# Altium PCB WINGS_SIGNAL_NODE_PCB.PcbDoc
Units mm, origin at the board's own origin, x right, y up, seen from the top; angles counter-clockwise.
Board outline 100 x 40 mm, 2 copper layers (Top Layer, Bottom Layer), stack 1.671 mm thick; 69 components, 47 nets, 252 pads, 758 vias.
Unrouted connection lines stored in the file: 1.
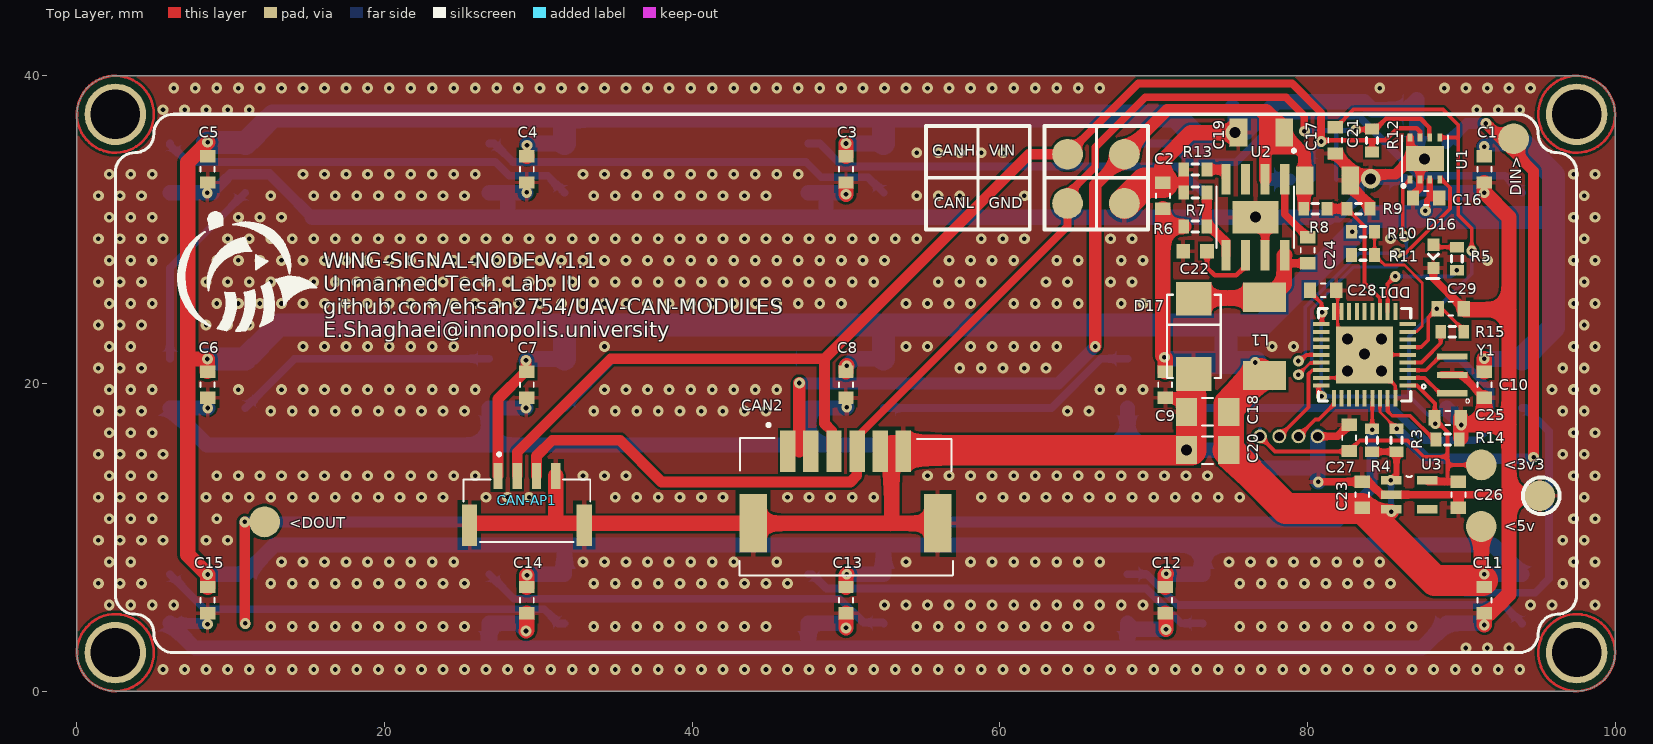
[diagram p0: Top Layer view]
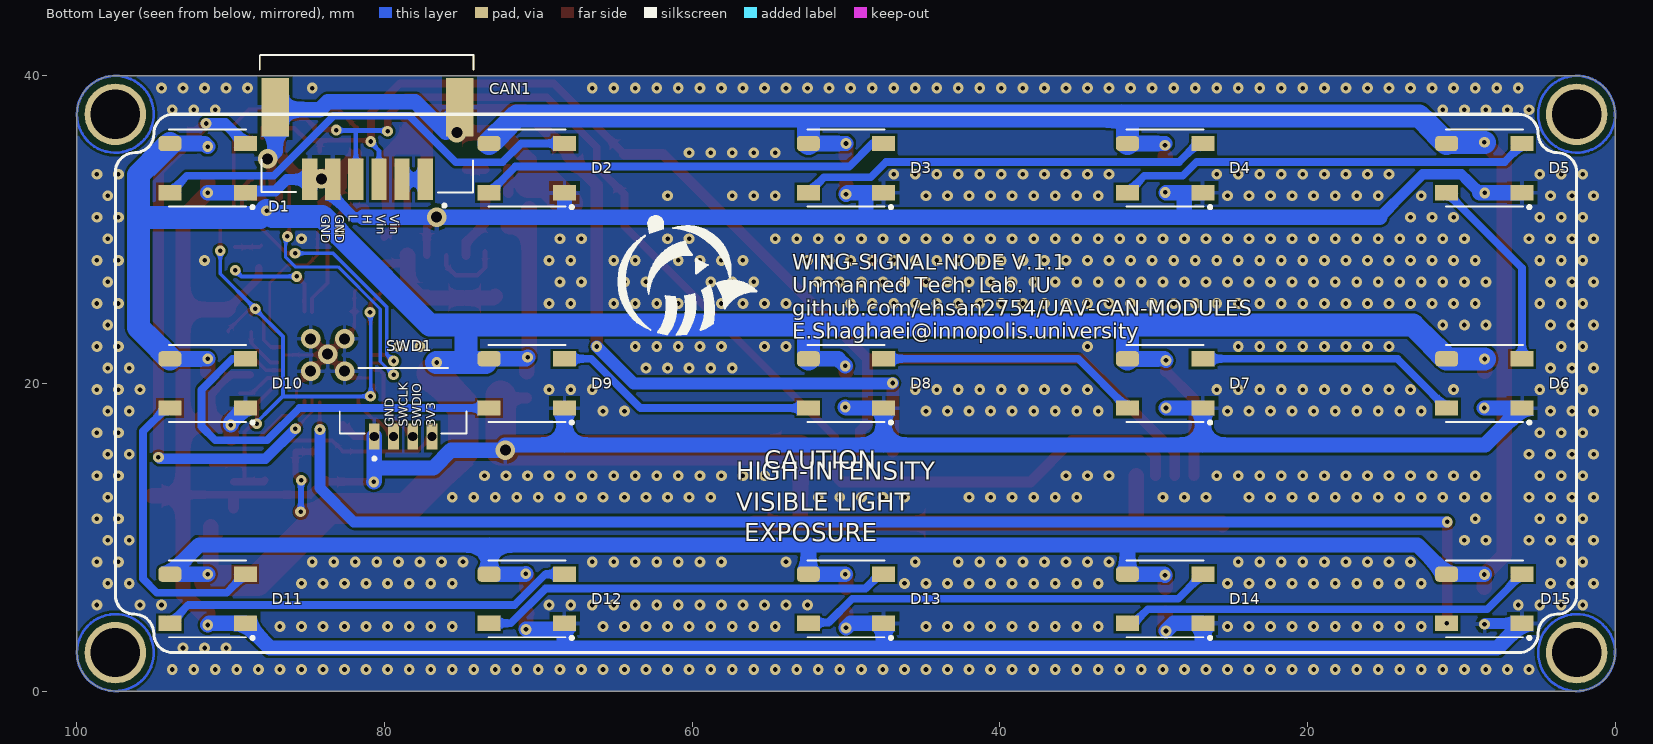
[diagram p1: Bottom Layer view, seen from below]
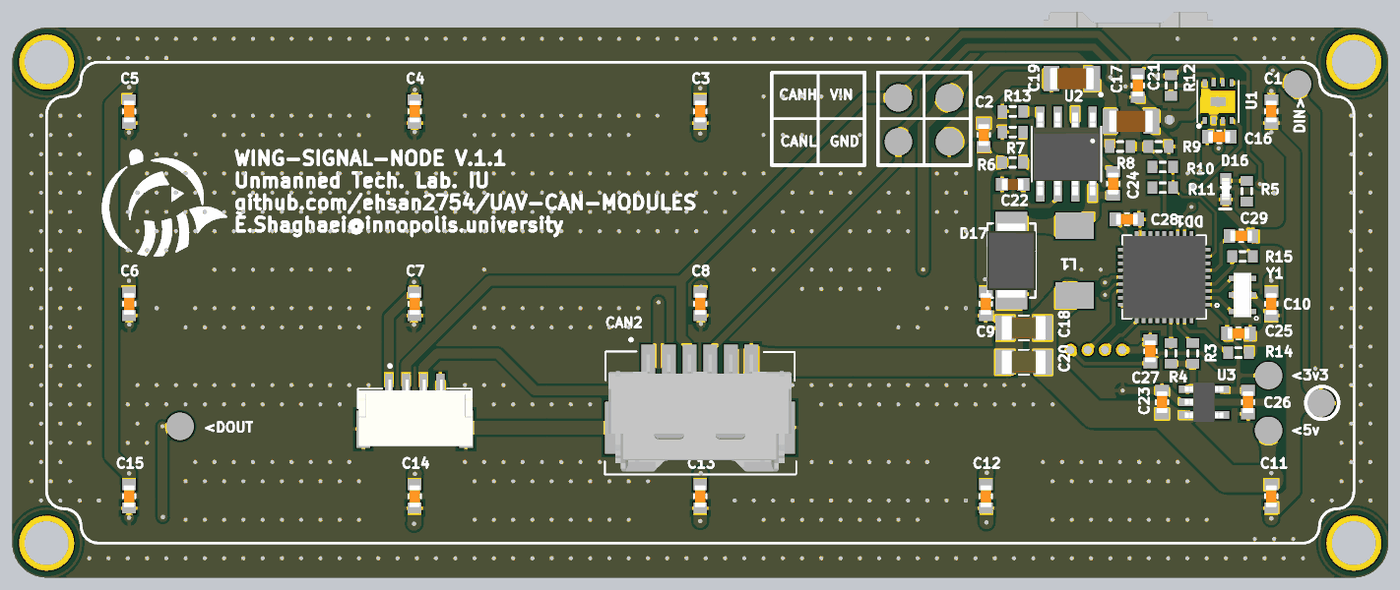
[diagram p2: 3D render of the assembled board from above, using the file's embedded part models]
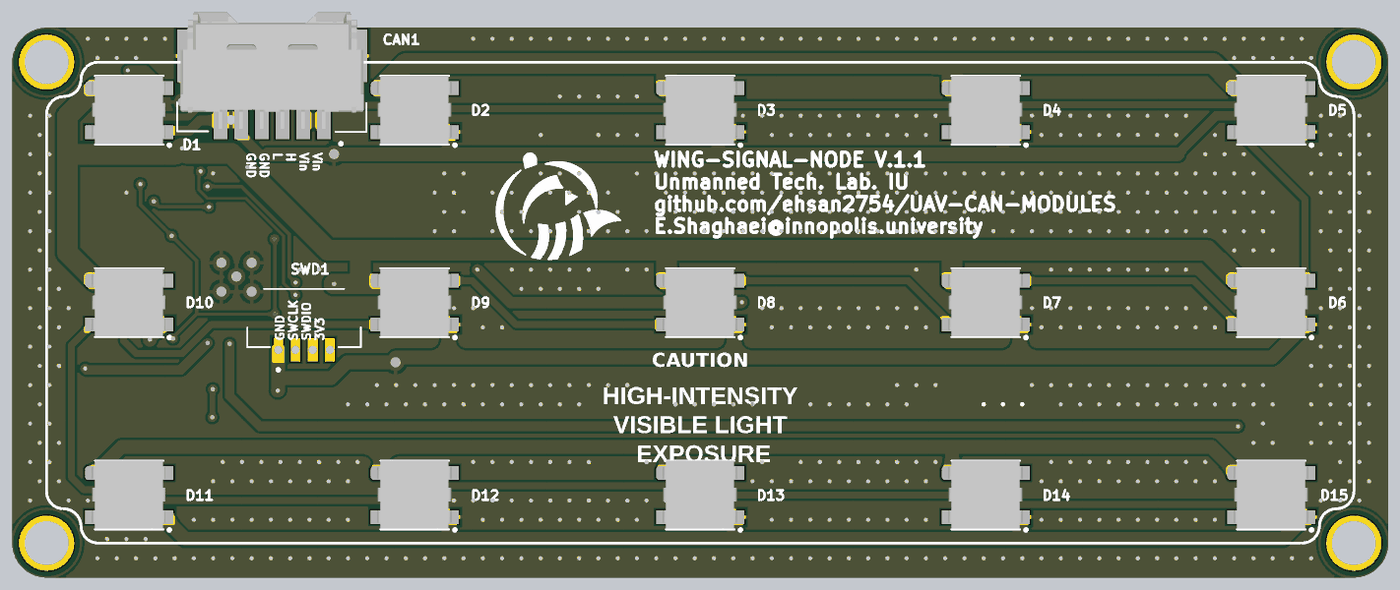
[diagram p3: 3D render of the assembled board from below, using the file's embedded part models]

## Layer stack, top to bottom
Top Solder: solder mask 0.0102, Solder Resist, Dk 3.5
Top Layer: signal copper 0.0356
Dielectric 1: dielectric 1.6, FR-4, Dk 4.8
Bottom Layer: signal copper 0.0356
Bottom Solder: solder mask 0.0102, Solder Resist, Dk 3.5

## Board outline
2.5,0 cw(c2.5,2.5) 0,2.5 0,37.5 cw(c2.5,37.5) 2.5,40 97.5,40 cw(c97.5,37.5) 100,37.5 100,2.5 cw(c97.5,2.5) 97.5,0

## Design rules (kind name [scope] priority, off if disabled: settings)
Clearance [All] p1: gap=0.17 ignorepadtopadclearanceinfootprint=FALSE
ComponentClearance [All] p1: gap=0.01 collisioncheckmode=3 verticalgap=0.01 showdistances=FALSE
FanoutControl Fanout_SOIC [IsSOIC] p3: bgadir=Out bgaviamode=Closest fanoutstyle=Auto fanoutdirection=Alternating viagrid=0.025 // Fanout_SOIC (Default Rule)
FanoutControl Fanout_Small [(CompPinCount < 5)] p4: bgadir=Out bgaviamode=Closest fanoutstyle=Auto fanoutdirection=OutThenIn viagrid=0.025 // Fanout_Small (Default Rule)
FanoutControl Fanout_Default [All] p5: bgadir=In bgaviamode=Closest fanoutstyle=Auto fanoutdirection=Alternating viagrid=0.025 // Fanout_Default (Default Rule)
PolygonConnect [All] p1: connectstyle=Relief reliefconductorwidth=0.254 reliefentries=4 polygonreliefangle="90 Angle" airgapwidth=0.254
RoutingCorners [All] p1: cornerstyle=45-Degree minsetback=2.5 maxsetback=2.5
RoutingPriority [All] p1 off: routingpriority=0
RoutingVias [All] p1: holewidth=0.3 width=0.7 viastyle="Through Hole" minholewidth=0.3 minwidth=0.7 maxholewidth=1 maxwidth=1.5
SolderMaskExpansion [All] p1: expansion=0.102 istentingtop=FALSE
Width [All] p1: maxlimit=5 minlimit=0.17 preferedwidth=0.3
24 further rules are at their usual default settings.

## Components (designator, comment, footprint, x,y, rotation, side; value= is the part's Value field where it differs from the comment)
C1 "GX035C104MAT2-500" *CAPC1608X90 91.5,33.912 r270 top value=0.1u
C2 "GX035C104MAT2-500" *CAPC1608X90 70.6,32.2 r90 top value=0.1u
C3 "GX035C104MAT2-500" *CAPC1608X90 50,33.912 r270 top value=0.1u
C4 "GX035C104MAT2-500" *CAPC1608X90 29.25,33.912 r270 top value=0.1u
C5 "GX035C104MAT2-500" *CAPC1608X90 8.5,33.912 r270 top value=0.1u
C6 "GX035C104MAT2-500" *CAPC1608X90 8.5,19.912 r270 top value=0.1u
C7 "GX035C104MAT2-500" *CAPC1608X90 29.25,19.912 r270 top value=0.1u
C8 "GX035C104MAT2-500" *CAPC1608X90 50,19.912 r270 top value=0.1u
C9 "GX035C104MAT2-500" *CAPC1608X90 70.75,19.912 r270 top value=0.1u
C10 "GX035C104MAT2-500" *CAPC1608X90 91.5,19.912 r270 top value=0.1u
C11 "GX035C104MAT2-500" *CAPC1608X90 91.5,5.912 r270 top value=0.1u
C12 "GX035C104MAT2-500" *CAPC1608X90 70.75,5.912 r270 top value=0.1u
C13 "GX035C104MAT2-500" *CAPC1608X90 50,5.912 r270 top value=0.1u
C14 "GX035C104MAT2-500" *CAPC1608X90 29.25,5.912 r270 top value=0.1u
C15 "GX035C104MAT2-500" *CAPC1608X90 8.5,5.912 r270 top value=0.1u
C16 "GX035C104MAT2-500" *CAPC1608X90 87.712,32.06 r180 top value=0.1u
C17 "GRM31CR71H225KA88L" *CAP3216X125N 81.3,33.2 r0 top value=2.2u
C18 "GRM31CR61A476KE15L" *CAPC3216X125N 73.512,18.16 r0 top value=47u
C19 "GRM31CR71H225KA88L" *CAP3216X125N 77,36.3 r180 top value=2.2u
C20 "GRM31CR61A476KE15L" *CAPC3216X125N 73.512,15.66 r0 top value=47u
C21 "GX035C104MAT2-500" *CAPC1608X90 81.8,35.8 r270 top value=0.1u
C22 "GRM188R71C105KA12D" CAPC1608X90N 72.7,28.6 r0 top value=1u
C23 "GX035C104MAT2-500" *CAPC1608X90 83.559,12.76 r90 top value=0.1u
C24 "GX035C104MAT2-500" *CAPC1608X90 80.012,28.66 r90 top value=0.1u
C25 "GX035C104MAT2-500" *CAPC1608X90 89.112,17.76 r0 top value=0.1u
C26 "GX035C104MAT2-500" *CAPC1608X90 89.812,12.76 r270 top value=0.1u
C27 "GX035C104MAT2-500" *CAPC1608X90 82.712,16.46 r90 top value=0.1u
C28 "GX035C104MAT2-500" *CAPC1608X90 81.012,26.06 r0 top value=0.1u
C29 "GX035C104MAT2-500" *CAPC1608X90 89.312,24.86 r0 top value=0.1u
CAN1 "502585-0670" MOLEX_502585-0670 81.112,33.46 r0 bottom
CAN2 "502585-0670" MOLEX_502585-0670 49.969,15.4 r0 top
CAN-AP1 "SM04B-GHS-TB(LF)(SN)-" JST_SM04B-GHS-TB(LF)(SN)- 29.25,11.719 r0 top
D1 "WS2812" LED_WS2812 91.5,34 r180 bottom
D2 "WS2812" LED_WS2812 70.75,34 r180 bottom
D3 "WS2812" LED_WS2812 50,34 r180 bottom
D4 "WS2812" LED_WS2812 29.25,34 r180 bottom
D5 "WS2812" LED_WS2812 8.5,34 r180 bottom
D6 "WS2812" LED_WS2812 8.5,20 r180 bottom
D7 "WS2812" LED_WS2812 29.25,20 r180 bottom
D8 "WS2812" LED_WS2812 50,20 r180 bottom
D9 "WS2812" LED_WS2812 70.75,20 r180 bottom
D10 "WS2812" LED_WS2812 91.5,20 r180 bottom
D11 "WS2812" LED_WS2812 91.5,6 r180 bottom
D12 "WS2812" LED_WS2812 70.75,6 r180 bottom
D13 "WS2812" LED_WS2812 50,6 r180 bottom
D14 "WS2812" LED_WS2812 29.25,6 r180 bottom
D15 "WS2812" LED_WS2812 8.5,6 r180 bottom
D16 "0603-LED-BLUE" *LEDM1608X80_LTE-C1906R-14(Primary) 88.187,28.26 r90 top
D17 "SK56" *SMB_P6SMB62AT3G(Primary) 72.612,23.06 r90 top
DD1 "STM32F103T8" *QFN50P600X600X100-37N 83.712,21.86 r180 top
L1 "IHLP2020BZER100M01" IHLP 77.212,23.06 r90 top
R3 "Res3" J1-0603 85.792,16.31 r270 top value=10K
R4 "Res3" J1-0603 84.2,16.31 r270 top value=10K
R5 "Res3" J1-0603 89.712,28.11 r90 top value=330
R6 "Res3" J1-0603 72.7,30.2 r180 top value=56k
R7 "RC0603FR-0710KL" J1-0603 72.712,32.41 r0 top value=10k
R8 "Res3" J1-0603 80.512,31.36 r180 top value=180k
R9 "Res3" J1-0603 83.312,31.36 r180 top value=10k
R10 "RC0603FR-0710KL" J1-0603 83.612,29.86 r180 top value=10k
R11 "RC0603FR-0710KL" J1-0603 83.612,28.36 r0 top value=10k
R12 "Res3" J1-0603 84.2,35.8 r270 top value=120
R13 "Res3" J1-0603 72.712,33.91 r0 top value=56k
R14 "RC0603FR-0710KL" J1-0603 89.112,16.36 r180 top value=10k
R15 "RC0603FR-0710KL" J1-0603 89.412,23.36 r180 top value=10k
SWD1 "BM04B-GHS-TBT(LF)(SN)(N)" JST_BM04B-GHS-holes 78.787,19.91 r0 bottom
U1 "TJA1042" SOT782-1 87.637,34.622 r0 top
U2 "LMR16030SDDAR" "*SOIC127P600X170-9N - duplicate" 76.612,30.81 r270 top
U3 "SPX3819M5-L-3-3/TR" *SOT95P280X145-5N 86.612,12.76 r0 top value=3V3
Y1 "CSTCE8M00G55-R0" *OSC_CSTCE8M00G55-R0 89.412,20.56 r90 top

## Footprints (in the part's own frame and the unit in brackets; to place one, negate y for a bottom-side part, rotate by r counter-clockwise, add the part's x,y. Pads: shape width x height; smd on the part's side, far side on the other; paste and mask are expansions set on the pad)
*CAP3216X125N [mm]
  rect 1.15x1.82 smd: 1(-1.485,0) 2(1.485,0)
  body extent -1.6,-0.8 1.6,0.8, height 1.22
*CAPC1608X90 [mm]
  rect 0.8x1 smd: 1(-0.85,0) 2(0.85,0)
  silkscreen extent -0.15,-0.45 0.15,0.45, body extent -0.8,-0.4 0.8,0.41, height 0.88
*CAPC3216X125N [mm]
  rect 1.38x1.82 smd: 1(-1.369,0) 2(1.369,0)
  silkscreen extent -0.36,-0.9 0.36,0.9, body extent -1.6,-0.87 1.6,0.87, height 1.71
*LEDM1608X80_LTE-C1906R-14(Primary) [mm]
  rect 0.8x0.8 smd: A(0.75,0) C(-0.75,0)
  silkscreen extent -1.45,-0.38 0.16,0.45, body extent -0.8,-0.3 0.8,0.3, height 1.15
*OSC_CSTCE8M00G55-R0 [mm]
  rect 0.4x2 smd: 1(-1.2,0) 2(0,0) 3(1.2,0)
  silkscreen extent -1.83,-1.13 -1.57,-0.87, body extent -1.6,-0.65 1.6,0.65, height 1
*QFN50P600X600X100-37N [mm]
  rect 1.08x0.26 smd: 1(-2.815,2) 2(-2.815,1.5) 3(-2.815,1) 4(-2.815,0.5) 5(-2.815,0) 6(-2.815,-0.5) 7(-2.815,-1) 8(-2.815,-1.5) 9(-2.815,-2) 19(2.815,-2) 20(2.815,-1.5) 21(2.815,-1) 22(2.815,-0.5) 23(2.815,0) 24(2.815,0.5) 25(2.815,1) 26(2.815,1.5) 27(2.815,2)
  rect 0.26x1.08 smd: 10(-2,-2.815) 11(-1.5,-2.815) 12(-1,-2.815) 13(-0.5,-2.815) 14(0,-2.815) 15(0.5,-2.815) 16(1,-2.815) 17(1.5,-2.815) 18(2,-2.815) 28(2,2.815) 29(1.5,2.815) 30(1,2.815) 31(0.5,2.815) 32(0,2.815) 33(-0.5,2.815) 34(-1,2.815) 35(-1.5,2.815) 36(-2,2.815)
  rect 3.7x3.7 smd: 37(0,0)
  silkscreen extent -3.97,-3 3,3, body extent -3,-3 3,3, height 1
*SMB_P6SMB62AT3G(Primary) [mm]
  rect 2.2x2.3 smd: A(-2.45,0) C(2.45,0)
  silkscreen extent -2.7,-1.75 2.7,1.75, body extent -2.72,-1.78 2.72,1.78, height 2.49
"*SOIC127P600X170-9N - duplicate" [mm]
  rect 1.97x0.6 smd: 1(-2.475,1.905) 2(-2.475,0.635) 3(-2.475,-0.635) 4(-2.475,-1.905) 5(2.475,-1.905) 6(2.475,-0.635) 7(2.475,0.635) 8(2.475,1.905)
  rect 2.13x3 smd: 9(0,0)
  silkscreen extent -4.42,-2.52 2,2.6, body extent -3,-2.45 3,2.45, height 1.69
*SOT95P280X145-5N [mil]
  rect 52x22 smd: 1(-46,37) 2(-46,0) 3(-46,-37) 4(46,-37) 5(46,37)
  silkscreen extent -7,46 7,48, body extent -55,-57 55,57, height 57
CAPC1608X90N [mm]
  rect 0.89x0.93 smd: 1(-0.77,0) 2(0.77,0)
  body extent -0.8,-0.4 0.8,0.4, height 0.9
IHLP [mil]
  rect 75x110 smd: 1(-100,0) 2(100,0)
  body extent -100,-100 100,100, height 79
J1-0603 [mm] "Chip Resistor, Body 1.6x0.8mm, IPC High Density"
  rect 0.7x0.9 smd: 1(-0.75,0) 2(0.75,0)
  silkscreen extent -0.2,-0.35 0.2,0.35, body extent -0.85,-0.48 0.85,0.48, height 0.9
JST_BM04B-GHS-holes [mm]
  rect 0.7x1.7 / inner rect 0.6x1.7 / far side round 0.9 hole 0.6: 1(1.875,3.35) 2(0.625,3.35) 3(-0.625,3.35) 4(-1.875,3.35)
  silkscreen extent -4.13,-1.1 4.13,4.9
JST_SM04B-GHS-TB(LF)(SN)- [mm]
  rect 0.6x1.7 smd: 1(-1.875,2.275) 2(-0.625,2.275) 3(0.625,2.275) 4(1.875,2.275)
  rect 1x2.7 smd: SH1(-3.725,-0.925) SH2(3.725,-0.925)
  silkscreen extent -4.13,-2.02 4.13,3.77, body extent -4.06,-2.16 4.19,2.69, height 4.35
LED_WS2812 [mm]
  rrect50% 1.5x1 smd: 1(-2.45,1.6)
  rect 1.5x1 smd: 2(-2.45,-1.6) 3(2.45,-1.6) 4(2.45,1.6)
  silkscreen extent -2.5,-2.64 3.02,2.5, body extent -2.7,-2.45 2.65,2.5, height 1.5
MOLEX_502585-0670 [mm]
  rect 1x2.7 smd: 1(-3.75,0.2) 2(-2.25,0.2) 3(-0.75,0.2) 4(0.75,0.2) 5(2.25,0.2) 6(3.75,0.2)
  rect 1.8x3.8 smd: P1(-6,-4.5) P2(6,-4.5)
  silkscreen extent -6.9,-7.9 7,2, body extent -6.65,-7.68 6.65,0.82, height 6.41
SOT782-1 [mm]
  rect 0.3x0.525 smd: 1(-0.975,-1.362) 2(-0.325,-1.362) 3(0.325,-1.362) 4(0.975,-1.362) 5(0.975,1.362) 6(0.325,1.362) 7(-0.325,1.362) 8(-0.975,1.362)
  rect 2.45x1.65 smd paste-2: P$9(0,0)
  silkscreen extent -1.5,-1.88 1.5,1.5, body extent -1.52,-1.52 1.52,1.52, height 0.85

## Part data
C1 C2 C3 C4 C5 C6 C7 C8 C9 C10 C11 C12 C13 C14 C15 C16 C21 C23 C24 C25 C26 C27 C28 C29: "Cap Thin Film 0.1uf 50v 0603", Package="0603 AVX", MF=AVX, Pacage Metric=1608, SnapEDA_Link=https://www.snapeda.com/parts/GX035C104MAT2-500/AVX/view-part/?ref=snap, Type=SMD
  C1 C2 C3 C4 C5 C6 C7 C8 C9 C10 C11 C12 C13 C14 C15 C16 C21 C24 C25 C27 C28 C29: MP="GX035C104MAT2-500 or CL10B104JB8NNNC"
  C23 C26: MP=GX035C104MAT2-500
C17 C19: "1206 2.2 uF 50 V В±10% Tolerance X7R SMT Multilayer Ceramic Capacitor", Package="1206 Murata", MF="Murata Electronics", MP=GRM31CR71H225KA88L, SnapEDA_Link=https://www.snapeda.com/parts/GRM31CR71H225KA88L/Murata%20Electronics%20North%20America/view-part/?ref=snap, Type=SMD
C18 C20: "Multilayer Ceramic Capacitor, GRM Series, 47 - F, - 10%, X5R, 10 V, 1206 [3216 Metric]", Package="1206 Murata Electronics", MF="Murata Electronics", MP=GRM31CR61A476KE15L, SnapEDA_Link=https://www.snapeda.com/parts/GRM31CR61A476KE15L/Murata%20Electronics%20North%20America/view-part/?ref=snap, Type=SMD
C22: "SMD Capacitor X7R(EIA) with Capacitance: 1.0uF Tol. 10%. Rated Voltage: 16Vdc", Package=0603, ChipDip_Link=https://www.chipdip.ru/product/grm188r71c105ka12d, HelpURL=https://static.chipdip.ru/lib/428/DOC005428493.pdf, MF="Murata Electronics", MP=GRM188R71C105KA12D, Pacage Metric=1608, SnapEDA_Link=https://www.snapeda.com/parts/GRM188R71C105KA12D/Murata%20Electronics%20North%20America/view-part/228340/?ref=snap, Type=SMD
CAN1 CAN2: "1.50mm Pitch, CLIK-Mate PCB Receptacle, Single Row, Surface Mount, Right-Angle, Tin Plating, Positive Lock, 6 Circuits, Natural", Package=None, MF=Molex, MP=502585-0670, SnapEDA_Link=https://www.snapeda.com/parts/502494-0670/Molex/view-part/?ref=snap, System=Connector, Type=SMD
CAN-AP1: "Connector Header Surface Mount, Right Angle 4 position 0.049 _1.25mm_", Package=None, ChipDip_Link=https://www.chipdip.ru/product/sm04b-ghs-tb-lf-sn-gh-1.25mm-header-side-ent, HelpURL=http://www.farnell.com/datasheets/2082975.pdf, MF="JST Sales", MP=SM04B-GHS-TB(LF)(SN), SnapEDA_Link=https://www.snapeda.com/parts/SM04B-GHS-TB%28LF%29%28SN%29-/JST%20Sales%20America%20Inc./view-part/2759740/?ref=snap, System=Connector
D1 D2 D3 D4 D5 D6 D7 D8 D9 D10 D11 D12 D13 D14 D15: "Addressable Lighting - 5 LED Discrete Serial _Shift Register_ Red, Green, Blue _RGB_ 5.00mm Dia", Package="SparkFun Electronics", Availability=Unavailable, ChipDip_Link=https://www.chipdip.ru/product/ws2812b, HelpURL=https://static.chipdip.ru/lib/554/DOC001554925.pdf, MF="SparkFun Electronics", MP=WS2812, Price=None, SnapEDA_Link=https://www.snapeda.com/parts/WS2812/SparkFun%20Electronics/view-part/106391/?ref=snap
D16: library part LTE-C1906R-14, "LED IrLED Chip LED 2-Pin SMD T/R", Package="0603 Lite-On", MP=0603-LED-BLUE, SnapEDA_Link=https://www.snapeda.com/parts/LTE-C1906R-14/Lite-On%20Inc./view-part/?ref=snap, Type=SMD
D17: "Диод Шоттки 5А 60В [SMB / DO-214AA]", Package="DO-214 Littelfuse", ChipDip_Link=https://www.chipdip.ru/product/sk56, MF="Littelfuse Inc.", MP=SK56, SnapEDA_Link=https://www.snapeda.com/parts/P6SMB62AT3G/Littelfuse%20Inc./view-part/?ref=snap, Type=SMD
DD1: "STM32F103T8U6, Микроконтроллер 32BIT ARM 64K FLASH [VFQFPN-36]", Package=VFQFPN-36, ChipDip_Link=https://www.chipdip.ru/product/stm32f103t8u6-2, HelpURL=http://www.st.com/stonline/products/literature/ds/13587.pdf, MF=STM, MP=STM32F103T8U6, SnapEDA_Link=https://www.snapeda.com/parts/STM32F103T8U6TR/STMicroelectronics/view-part/?ref=search&t=STM32F103T8U6, Type=SMD
L1: "10ÂµH Shielded Molded Inductor 2.3A 199mOhm Max Nonstandard", Package="Nonstandard Vishay", ChipDip_Link=https://www.chipdip.ru/product/ihlp2020bzer100m11-inductor-ihlp-smd-2020-10, HelpURL=http://www.vishay.com/docs/34253/ihlp-2020bz-01.pdf, MF="Vishay Dale", MP=IHLP2020BZER100M01, SnapEDA_Link=https://www.snapeda.com/parts/IHLP2020BZER100M01/Vishay%20Dale/view-part/44808/?ref=snap, Type=SMD
R3 R4 R5 R6 R8 R9 R13: "Resistor", Package=R0603, Pacage Metric=1608, Type=SMD
  R3 R4: ChipDip_Link=https://www.chipdip.ru/product0/9000079736, HelpURL=https://www.chipdip.ru/product0/9000079736, MP="4.7K 1% 0603"
  R5: ChipDip_Link=https://www.chipdip.ru/product0/9000079628, HelpURL=https://www.chipdip.ru/product0/9000079628, MP=RC0603FR-07330RL
  R6 R13: ChipDip_Link=https://www.chipdip.ru/product0/9000079754, HelpURL=https://www.chipdip.ru/product0/9000079754, MP=RC0603FR-0756KL
  R8: MP="180K 1% 0603"
  R9: ChipDip_Link=https://www.chipdip.ru/product0/9000079736, HelpURL=https://www.chipdip.ru/product0/9000079736, MP="10K 1% 0603"
R7 R10 R11 R14 R15: "10 kOhms 1 0.1 W 1 10 W Chip Resistor 0603 1608 Metric Thick Film", Package=R0603, ChipDip_Link=https://www.chipdip.ru/product0/9000079736, HelpURL=https://www.chipdip.ru/product0/9000079736, MF="Yageo or NXP", MP="10K 1% 0603", Pacage Metric=1608, SnapEDA_Link=https://www.snapeda.com/parts/RC0603FR-0710KL/Yageo/view-part/?ref=dk&t=RC0603FR-0710KL&con_ref=None, Type=SMD
R12: "120 Ohms 1 0.1 W 1 10 W Chip Resistor 0603 1608 Metric Thick Film", Package=R0603, ChipDip_Link=https://www.chipdip.ru/product0/9000079618, HelpURL=https://www.chipdip.ru/product0/9000079618, MP=RC0603FR-07120RL, Pacage Metric=1608, Type=SMD
SWD1: "Conn Shrouded Header HDR 4 POS 1.25mm Solder ST SMD Reel", Package=None, Instructions="Do not install", MF="JST Sales", MP=SM04B-GHS-TB(LF)(SN), SnapEDA_Link=https://www.snapeda.com/parts/BM04B-GHS-TBT%28LF%29%28SN%29%28N%29/JST%20Sales%20America%20Inc./view-part/?ref=snap, System=Connector, Type=SMD
U1: "1/1 Transceiver Half CANbus 8-SO", Package="VDFN-8 NXP USA", ChipDip_Link=https://www.chipdip.ru/product1/8002840332, HelpURL=https://static.chipdip.ru/lib/583/DOC001583059.pdf, MF="NXP USA", MP=TJA1042, SnapEDA_Link=https://www.snapeda.com/parts/TJA1042/NXP%20USA%20Inc./view-part/900919/?ref=snap, Type=SMD
U2: "LMR16030SDDAR, Conv DC-DC 4.3V to 60V Step Down Single-Out 1V to 50V 3A Automotive 8-Pin HSOP EP T/R", Package="PowerSOIC-8 Texas Instruments", ChipDip_Link=https://www.chipdip.ru/product1/8003448566, HelpURL=https://www.ti.com/lit/ds/symlink/lmr16030.pdf, MF="Texas Instruments", MP=LMR16030SDDAR, SnapEDA_Link=https://www.snapeda.com/parts/TPS54560DDA/Texas%20Instruments/view-part/?ref=snap, Type=SMD
U3: library part SPX3819M5-L, "Low Dropout Voltage Regulator, Adjustable 0.5A, В±1%, 2.5 to 16 Vin, 5-Pin SOT-23", Package="SOT-23-5 Exar", ChipDip_Link=https://www.chipdip.ru/product1/8003455237, HelpURL=http://www.farnell.com/datasheets/2614478.pdf, MF="MaxLinear, Inc.", MP=SPX3819M5-L-3-3/TR, SnapEDA_Link=https://www.snapeda.com/parts/SPX3819M5-L/MaxLinear%2C%20Inc./view-part/?ref=snap, Type=SMD
Y1: "Ceramic Resonator 8MHz ??0.5% _Tol_ ??0.2% _Stability_ 33pF 40Ohm 3-Pin CSMD T/R", Package="SMD-3 Murata", ChipDip_Link=https://www.chipdip.ru/product1/8001783721, HelpURL=https://www.murata.com/en-eu/api/pdfdownloadapi?cate=&partno=CSTCE8M00G55-R0, MF=Murata, MP=CSTCE8M00G55-R0, SnapEDA_Link=https://www.snapeda.com/parts/CSTCE8M00G55-R0/Murata%20Electronics%20North%20America/view-part/?ref=snap, Type=SMD

## Free pads (board coordinates)
  round 2 smd: 5(91.3,14.7) 6(68.1,31.7) 6(95.1,12.7) 8(91.3,10.7) 9(68.1,34.9) 10(12.2,11) 11(93.4,35.9) 12(64.4,31.7) 13(64.4,34.9)
  round 4 hole 3.2: ""(2.5,2.5) ""(2.5,37.5) ""(97.5,2.5) ""(97.5,37.5)

## Via types
v1: diameter 0.7, hole 0.3, Top Layer to Bottom Layer, tented both sides, 748 vias
v2: diameter 1.27, hole 0.711, Top Layer to Bottom Layer, tented both sides, 10 vias

## Nets (pads, with @x,y where several pads share a name; then routed paths per layer and width w, separated by ;. In a path a pad name is that pad's centre, name@x,y a point inside that pad or via, vN(x,y) a via of type N, cw(c..) or ccw(c..) an arc to the next point about the centre after c; other vN are vias at no path point)
3.3: C21.1 C25.1 C26.1 C27.1 C28.1 C29.1 DD1.1 DD1.6 DD1.19 DD1.27 pad.5 R15.1 SWD1.4 U1.5 U3.5 | length 79.1
  Top Layer w0.25: SWD1.4 77.896,15.576 82.746,15.576 C27.1 83.403,16.3 86.5,16.3 87.562,15.238 89.112,15.238 ; C28.1@80.112,26.06 80.112,26.01 80.912,25.21 v1@80.912,24.66 ; v1@80.712,19.17 80.712,19.855 80.717,19.86 DD1.27@80.812,19.86 ; DD1.19 80.937,23.86 80.942,23.865 v1(80.942,24.629) ; C21.1 81.85,36.65 83,37.8 88.8,37.8 89.8,36.8 89.8,35.985 89.8,35.863 ; DD1.1 87.123,19.86 88.283,18.7 88.283,17.78 C25.1 ; DD1.6@86.787,22.36 87.395,22.36 87.851,22.816 87.851,24.296 C29.1@88.404,24.849 ; C25.1@88.312,17.655 89.112,16.855 89.112,15.238 ; U1.5 89.679,35.985 89.8,35.863 ; C29.1@88.687,24.485 88.412,24.76 88.862,24.76 90.162,23.46 R15.1 ; 89.1,13.61 89.112,13.622 89.112,14.7 ; v1(90.682,28.622) 90.682,30.076 89.8,30.959 89.8,35.863 ; pad.5 89.112,14.7 ; 89.112,14.7 89.112,15.238
  Top Layer w0.5: U3.5 87.87,13.61 89.1,13.61 C26.1
  Bottom Layer w0.25: SWD1.4 SWD1.4@76.912,17.06 ; v1(80.942,24.629) 80.9,24.587 80.9,19.358 80.712,19.17 80.723,19.16 86.623,19.16 87.5,18.283 88.178,17.605 88.312,17.605 v1(88.312,17.38) ; 86.6,19.16 86.6,23.047 v1(88.412,24.86) ; v1@88.512,24.96 90.682,27.13 v1(90.682,28.622)
  other v1: 80.912,19.17
ADC_5V: DD1.8 R10.1 R11.2 | length 8.9
  Top Layer w0.18: R10.1 R11.2 85.022,27.7 86.3,27.7 87.46,26.54 87.46,23.741 87.079,23.36 DD1.8@86.912,23.36
ADC_VIN: DD1.12 R8.1 R9.2 | length 8.9
  Top Layer w0.25: R9.2@82.579,31.36 83.717,30.222 83.717,26.534 84.712,25.539 DD1.12@84.712,24.635
  Top Layer w0.6: R8.1 R9.2@82.512,31.36
BOOT0: DD1.35 R14.2 | length 4.6
  Top Layer w0.25: DD1.35@85.212,18.855 85.212,18.198 85.51,17.9 86.659,17.9 88.149,16.41 88.362,16.41 R14.2
CAN_H: CAN1.3 CAN2.3 CAN-AP1.2 pad.13 R12.2 U1.7 | length 83.4
  Top Layer w0.3: v1(80.9,35.73) 80.97,35.8 84.2,35.8 ; R12.2 84.2,35.8 ; U1.7 87.312,36.388 87.1,36.6 85.864,36.6 85.064,35.8 84.2,35.8
  Top Layer w0.5: pad.13 69,39.5 79,39.5 80.9,37.6 80.9,37.244 80.88,37.224 80.88,36.076 80.9,36.056 v1(80.9,35.73)
  Top Layer w0.7: CAN-AP1.2 28.625,15.525 34.7,21.6 48.6,21.6 ; CAN2.3 49.069,15.75 49.069,16.931 48.6,17.4 48.6,21.6 ; pad.13 61.9,34.9 48.6,21.6
  Bottom Layer w0.3: CAN1.3 80.362,35.137 80.9,35.674 v1(80.9,35.73)
CAN_L: CAN1.4 CAN2.4 CAN-AP1.3 pad.12 R12.1 U1.6 | length 80.1
  Top Layer w0.3: v1(83.141,36.47) 83.181,36.51 84.16,36.51 R12.1 ; R12.1@84.553,36.653 85.103,37.203 87.353,37.203 87.915,36.641 87.915,36.031 U1.6
  Top Layer w0.5: CAN2.4 50.719,16.544 64.4,30.225 pad.12 ; pad.12@64.4,31.82 64.4,32.3 66.2,34.1 66.2,35.352 69.448,38.6 78.6,38.6 79.8,37.4 v1(79.8,36.4)
  Top Layer w0.7: CAN-AP1.3 29.875,15.275 30.9,16.3 35.3,16.3 38,13.6 50.29,13.6 50.7,14.01 50.7,15.581 CAN2.4
  Bottom Layer w0.2: 81.862,36.397 81.91,36.445 81.936,36.47
  Bottom Layer w0.3: v1(79.8,36.4) 79.842,36.442 81.907,36.442 ; CAN1.4 81.862,36.397 ; 81.91,36.445 83.116,36.445 v1(83.141,36.47)
CAN_RXD: DD1.23 U1.4 | length 19.5
  Top Layer w0.25: v1(79.412,21.46) 79.532,21.46 79.931,21.86 DD1.23@80.759,21.86 ; v1(85.812,28.46) 86.36,28.46 89.257,31.357 89.257,32.726 88.724,33.26 U1.4
  Bottom Layer w0.25: v1(79.412,21.46) 79.424,21.46 79.857,21.892 79.857,24.979 83.337,28.46 v1(85.812,28.46)
CAN_TXD: DD1.24 U1.1 | length 19.3
  Top Layer w0.2: v1(79.412,20.56) 79.412,20.583 80.159,21.33 80.867,21.33 DD1.24 ; v1(86.312,29.56) 86.192,29.68 86.192,32.806 U1.1@86.616,33.23
  Bottom Layer w0.2: v1(79.412,20.56) 80.277,21.424 80.277,24.841 83.016,27.58 85.809,27.58 86.432,28.203 86.432,29.44 v1(86.312,29.56)
DIN: D1.4 DD1.34 pad.11 R3.1 | length 38.3
  Top Layer w0.2: DD1.34 84.712,18.139 v1(85.792,17.06)
  Top Layer w0.7: v1(91.6,36.9) 94.7,33.8 v1(94.7,15.2)
  Bottom Layer w0.7: v1(85.792,17.06) 87.752,15.1 94.6,15.1 v1(94.7,15.2) ; D1.4 90.35,36.9 v1(91.6,36.9)
DOUT: D15.2 DD1.33 pad.10 R4.1 | length 86.4
  Top Layer w0.25: R4.1@84.112,17.11 84.212,17.21 DD1.33@84.212,18.76 ; v1(84.2,17) R4.1
  Top Layer w0.7: v1(10.919,11) 10.919,4.431 v1(10.95,4.4)
  Bottom Layer w0.7: v1(10.919,11) 82,11 84.2,13.2 v1(84.2,17)
FB: R6.1 R7.2 U2.5 | length 4.5
  Top Layer w0.6: R6.1@73.462,30.41 R7.2 ; R6.1@73.512,30.36 74.707,29.165 U2.5
GND: C1.2 C2.2 C3.2 C4.2 C5.2 C6.2 C7.2 C8.2 C9.2 C10.2 C11.2 C12.2 C13.2 C14.2 C15.2 C16.2 C17.2 C18.1 C19.2 C20.1 C21.2 C22.1 C23.2 C25.2 C26.2 C27.2 C28.2 C29.2 CAN1.5 CAN1.6 CAN1.P1 CAN1.P2 CAN2.5 CAN2.6 CAN2.P1 CAN2.P2 CAN-AP1.4 CAN-AP1.SH1 CAN-AP1.SH2 D1.3 D2.3 D3.3 D4.3 D5.3 D6.3 D7.3 D8.3 D9.3 D10.3 D11.3 D12.3 D13.3 D14.3 D15.3 D16.C D17.A DD1.5 DD1.17 DD1.18 DD1.26 DD1.36 DD1.37 pad.6 R7.1 R9.1 R13.1 R14.1 SWD1.1 U1.2 U1.8 U1.P$9 U2.7 U2.9 U3.2 Y1.2 | length 493.6
  Top Layer w0.2: DD1.26 82.212,20.36 DD1.37 ; DD1.18 81.962,24.675 ; C28.2 81.962,25.96 81.962,24.675 ; DD1.17 81.962,24.675 ; DD1.36 85.712,19.86 DD1.37 ; DD1.5 DD1.37 ; 81.962,24.675 81.962,23.61 DD1.37
  Top Layer w0.3: DD1.37 83.712,21.912 DD1.37@84.7,22.9
  Top Layer w0.5: v2(76.612,30.81) 77.247,30.175 U2.7 ; SWD1.1 81.962,16.56 C27.2 ; v1(80.7,13.6) 80.71,13.61 C23.2 83.721,13.61 83.838,13.493 83.838,13.747 84.825,12.76 U3.2 93.04,12.76 ; U1.8 86.666,35.981 86.666,35.235 87.278,34.622 U1.P$9 87.312,34.297 U1.2 87.3,33.247 87.3,32.691 86.862,32.254 C16.2 ; D16.C 88.187,26.835 C29.2 ; Y1.2@88.731,20.56 Y1.2 90.023,20.56 C10.2@91.505,19.078 ; R14.1 R14.1@89.962,16.46
  Top Layer w0.7: C9.2 72.305,19.062 72.443,19.2 ; C2.2@70.75,33.062 71.864,33.062 71.962,33.16 ; R7.1 71.962,33.16 ; R13.1 71.962,33.16 ; C21.2 82.785,33.965 C17.2 ; R9.1@84,31.6 82.785,32.815 C17.2 ; U1.P$9@86.865,34.764 85.7,33.6 83.185,33.6 C17.2 ; C26.2 89.812,12.592
  Top Layer w1: CAN-AP1.SH1 25.525,10.9 31,10.9 ; v1(29.2,3.91) 29.25,3.96 C14.2 ; CAN-AP1.4 31.125,11.025 31,10.9 ; v1(50,4.11) C13.2 ; v1(50,32.3) C3.2@50,32.9 ; 52.969,15.6 52.969,10.969 52.9,10.9 ; CAN2.P2 52.9,10.9 ; C2.2 70.6,34.5 72.4,36.3 v2(75.3,36.3) C19.2 ; C12.2 70.8,5.012 v1(70.8,4.01) ; R14.1@89.962,16.46 C25.2 ; v1(90,17.3) 91.49,17.3 ; C29.2 90.222,24.8 93.1,24.8 ; v1(91.5,4.3) C11.2 91.862,5.062 93.1,6.3 93.1,12.7 ; C10.2 91.49,19.052 91.49,17.3 ; C1.2 v1(91.5,32.4) 93.1,30.8 93.1,24.8 ; 93.04,12.76 93.1,12.7 ; pad.6@95.1,12.7 93.1,12.7 ; 31,10.9 CAN2.P1 52.9,10.9 ; 91.49,17.3 93.1,17.3 ; 93.1,12.7 93.1,17.3 ; 93.1,17.3 93.1,24.8
  Top Layer w2: 52.969,15.6 53.029,15.66 v2(72.143,15.66) ; pad.6@68.1,31.7 68.1,31.706 69.444,33.05 C2.2 ; C20.1@72.443,15.66 72.443,19.2
  Bottom Layer w0.7: D15.3 8.443,4.4 v1(8.49,4.353) ; v1@8.8,32.4 10,33.6 12.5,33.6 15.3,30.8 ; 81.4,30.8 82,30.8 83.362,32.162 CAN1.5 CAN1.6 86.352,33.26 87.108,32.503 88.947,32.503 D1.3
  Bottom Layer w1: D15.3 7.65,2.8 26.9,2.8 ; D5.3 v1@8.8,32.4 ; v1(8.506,18.406) 8.5,18.4 D6.3 8.45,16 26.8,16 ; 15.3,30.8 27.8,30.8 ; D4.3 28,32.4 ; v1(29.2,3.91) 28.71,4.4 D14.3 26.8,2.9 26.9,2.8 ; v1(29.2,18.4) D7.3 26.8,16 ; v1@29.2,32.4 28,32.4 ; D3.3 49.9,32.4 v1(50,32.3) ; 48.7,32.175 48.7,30.8 ; v1(50,4.11) 49.71,4.4 D13.3 47.55,2.85 47.5,2.8 ; v1(50.05,18.464) 49.986,18.4 D8.3 47.55,16 ; D9.3 68.3,16 ; D2.3 68.3,30.8 ; v1(70.8,4.01) 68.69,4.01 D12.3 68.3,3.1 68,2.8 ; v2@72.143,15.784 72.268,15.66 75.665,15.66 76.824,14.5 80.667,14.5 ; v2@72.143,16 68.3,16 ; CAN1.P1 CAN1.P1@75.3,37.772 ; v2(75.3,36.3) CAN1.P1@75.3,37.772 ; SWD1.1 80.667,16.555 80.667,14.5 ; v1(80.7,13.6) 80.667,13.633 80.667,14.5 ; 81.4,30.8 68.3,30.8 ; v2(87.6,34.6) 87.112,35.088 CAN1.P2 87.112,38.46 86.453,37.8 84.201,37.8 83.681,38.32 78.019,38.32 76.012,36.313 76.012,37.06 CAN1.P1@75.3,37.772 ; D10.3 90,17.45 v1(90,17.3) ; D1.3 v1(91.5,32.4) ; v1(91.5,4.3) 91.4,4.4 D11.3 87.45,2.8 68,2.8 ; 26.8,16 47.55,16 ; 26.9,2.8 47.5,2.8 ; 27.8,30.8 48.7,30.8 ; 27.8,30.8 28,31 28,32.4 ; 47.5,2.8 68,2.8 ; 47.55,16 68.3,16 ; 48.7,30.8 68.3,30.8
  other v1: 5.6,1.4 7,1.4 8.4,1.4 9.8,1.4 11.2,1.4 12.6,1.4 14,1.4 15.4,1.4 16.8,1.4 18.2,1.4 19.6,1.4 21,1.4 22.4,1.4 23.8,1.4 25.2,1.4 26.6,1.4 28,1.4 29.4,1.4 30.8,1.4 32.2,1.4 33.6,1.4 35,1.4 36.4,1.4 37.8,1.4 39.2,1.4 40.6,1.4 42,1.4 43.4,1.4 44.8,1.4 46.2,1.4 47.6,1.4 49,1.4 50.4,1.4 51.8,1.4 53.2,1.4 54.6,1.4 56,1.4 57.4,1.4 58.8,1.4 60.2,1.4 61.6,1.4 63,1.4 64.4,1.4 65.8,1.4 67.2,1.4 68.6,1.4 70,1.4 71.4,1.4 72.8,1.4 74.2,1.4 75.6,1.4 77,1.4 78.4,1.4 79.8,1.4 81.2,1.4 82.6,1.4 84,1.4 85.4,1.4 86.8,1.4 88.2,1.4 89.6,1.4 91,1.4 92.4,1.4 93.8,1.4 90.3,2.8 91.7,2.8 93.1,2.8 12.6,4.2 14,4.2 15.4,4.2 16.8,4.2 18.2,4.2 19.6,4.2 21,4.2 22.4,4.2 23.8,4.2 25.2,4.2 33.6,4.2 35,4.2 36.4,4.2 37.8,4.2 39.2,4.2 40.6,4.2 42,4.2 43.4,4.2 44.8,4.2 54.6,4.2 56,4.2 57.4,4.2 58.8,4.2 60.2,4.2 61.6,4.2 63,4.2 64.4,4.2 65.8,4.2 75.6,4.2 77,4.2 78.4,4.2 79.8,4.2 81.2,4.2 82.6,4.2 84,4.2 85.4,4.2 86.8,4.2 2.1,5.6 3.5,5.6 4.9,5.6 6.3,5.6 52.5,5.6 53.9,5.6 55.3,5.6 56.7,5.6 58.1,5.6 59.5,5.6 60.9,5.6 62.3,5.6 63.7,5.6 65.1,5.6 66.5,5.6 67.9,5.6 69.3,5.6 94.5,5.6 95.9,5.6 98.7,5.6 1.4,7 2.8,7 4.2,7 12.6,7 14,7 15.4,7 16.8,7 18.2,7 19.6,7 21,7 22.4,7 23.8,7 25.2,7 33.6,7 35,7 36.4,7 37.8,7 39.2,7 40.6,7 42,7 43.4,7 44.8,7 46.2,7 75.6,7 77,7 78.4,7 79.8,7 81.2,7 82.6,7 84,7 85.4,7 96.6,7 98,7 2.1,8.4 3.5,8.4 13.3,8.4 14.7,8.4 16.1,8.4 17.5,8.4 18.9,8.4 20.3,8.4 21.7,8.4 23.1,8.4 24.5,8.4 32.9,8.4 34.3,8.4 35.7,8.4 37.1,8.4 38.5,8.4 39.9,8.4 41.3,8.4 42.7,8.4 45.5,8.4 53.9,8.4 58.1,8.4 59.5,8.4 60.9,8.4 62.3,8.4 63.7,8.4 65.1,8.4 66.5,8.4 74.9,8.4 76.3,8.4 77.7,8.4 79.1,8.4 80.5,8.4 81.9,8.4 83.3,8.4 84.7,8.4 97.3,8.4 98.7,8.4 1.4,9.8 2.8,9.8 4.2,9.8 5.6,9.8 8.4,9.8 9.8,9.8 96.6,9.8 98,9.8 2.1,11.2 3.5,11.2 4.9,11.2 9.1,11.2 97.3,11.2 98.7,11.2 1.4,12.6 2.8,12.6 4.2,12.6 5.6,12.6 8.4,12.6 9.8,12.6 11.2,12.6 12.6,12.6 14,12.6 15.4,12.6 16.8,12.6 18.2,12.6 19.6,12.6 21,12.6 22.4,12.6 23.8,12.6 26.6,12.6 28,12.6 29.4,12.6 35,12.6 36.4,12.6 37.8,12.6 39.2,12.6 40.6,12.6 42,12.6 46.2,12.6 47.6,12.6 49,12.6 50.4,12.6 51.8,12.6 58.8,12.6 60.2,12.6 61.6,12.6 63,12.6 64.4,12.6 65.8,12.6 67.2,12.6 68.6,12.6 70,12.6 71.4,12.6 72.8,12.6 74.2,12.6 75.6,12.6 98,12.6 2.1,14 3.5,14 4.9,14 9.1,14 10.5,14 11.9,14 13.3,14 14.7,14 16.1,14 17.5,14 18.9,14 20.3,14 21.7,14 23.1,14 24.5,14 25.9,14 32.9,14 34.3,14 35.7,14 55.3,14 56.7,14 58.1,14 59.5,14 60.9,14 62.3,14 63.7,14 65.1,14 66.5,14 67.9,14 69.3,14 70.7,14 72.1,14 73.5,14 97.3,14 98.7,14 1.4,15.4 2.8,15.4 4.2,15.4 5.6,15.4 96.6,15.4 98,15.4 2.1,16.8 3.5,16.8 4.9,16.8 97.3,16.8 98.7,16.8 1.4,18.2 2.8,18.2 4.2,18.2 12.6,18.2 14,18.2 15.4,18.2 16.8,18.2 18.2,18.2 19.6,18.2 21,18.2 22.4,18.2 23.8,18.2 25.2,18.2 33.6,18.2 35,18.2 36.4,18.2 37.8,18.2 39.2,18.2 40.6,18.2 42,18.2 43.4,18.2 44.8,18.2 64.4,18.2 65.8,18.2 96.6,18.2 98,18.2 2.1,19.6 3.5,19.6 4.9,19.6 10.5,19.6 13.3,19.6 14.7,19.6 16.1,19.6 17.5,19.6 18.9,19.6 20.3,19.6 21.7,19.6 23.1,19.6 24.5,19.6 25.9,19.6 34.3,19.6 35.7,19.6 37.1,19.6 38.5,19.6 39.9,19.6 41.3,19.6 42.7,19.6 44.1,19.6 45.5,19.6 66.5,19.6 67.9,19.6 69.3,19.6 95.9,19.6 97.3,19.6 98.7,19.6 1.4,21 2.8,21 4.2,21 57.4,21 58.8,21 60.2,21 61.6,21 63,21 96.6,21 98,21 2.1,22.4 3.5,22.4 14.7,22.4 16.1,22.4 17.5,22.4 18.9,22.4 20.3,22.4 21.7,22.4 23.1,22.4 24.5,22.4 34.3,22.4 53.9,22.4 55.3,22.4 58.1,22.4 59.5,22.4 60.9,22.4 62.3,22.4 63.7,22.4 77.7,22.4 79.1,22.4 97.3,22.4 98.7,22.4 1.4,23.8 2.8,23.8 4.2,23.8 8.4,23.8 9.8,23.8 11.2,23.8 98,23.8 2.1,25.2 3.5,25.2 4.9,25.2 9.1,25.2 10.5,25.2 11.9,25.2 13.3,25.2 14.7,25.2 16.1,25.2 17.5,25.2 18.9,25.2 20.3,25.2 21.7,25.2 23.1,25.2 24.5,25.2 25.9,25.2 27.3,25.2 28.7,25.2 30.1,25.2 31.5,25.2 32.9,25.2 34.3,25.2 35.7,25.2 37.1,25.2 38.5,25.2 39.9,25.2 41.3,25.2 42.7,25.2 44.1,25.2 45.5,25.2 46.9,25.2 48.3,25.2 49.7,25.2 53.9,25.2 55.3,25.2 56.7,25.2 58.1,25.2 60.9,25.2 62.3,25.2 63.7,25.2 65.1,25.2 67.9,25.2 69.3,25.2 97.3,25.2 98.7,25.2 1.4,26.6 2.8,26.6 4.2,26.6 8.4,26.6 9.8,26.6 11.2,26.6 12.6,26.6 14,26.6 15.4,26.6 16.8,26.6 18.2,26.6 19.6,26.6 21,26.6 22.4,26.6 23.8,26.6 25.2,26.6 26.6,26.6 28,26.6 29.4,26.6 30.8,26.6 32.2,26.6 33.6,26.6 35,26.6 36.4,26.6 37.8,26.6 39.2,26.6 40.6,26.6 42,26.6 43.4,26.6 44.8,26.6 46.2,26.6 47.6,26.6 49,26.6 50.4,26.6 51.8,26.6 56,26.6 57.4,26.6 58.8,26.6 63,26.6 64.4,26.6 67.2,26.6 68.6,26.6 98,26.6 2.1,28 3.5,28 4.9,28 9.1,28 10.5,28 11.9,28 13.3,28 14.7,28 16.1,28 17.5,28 18.9,28 20.3,28 21.7,28 23.1,28 24.5,28 25.9,28 27.3,28 28.7,28 30.1,28 31.5,28 32.9,28 34.3,28 35.7,28 37.1,28 38.5,28 39.9,28 41.3,28 42.7,28 44.1,28 45.5,28 46.9,28 48.3,28 49.7,28 51.1,28 52.5,28 56.7,28 58.1,28 59.5,28 60.9,28 63.7,28 65.1,28 67.9,28 69.3,28 91.7,28 97.3,28 98.7,28 1.4,29.4 2.8,29.4 4.2,29.4 5.6,29.4 9.8,29.4 11.2,29.4 12.6,29.4 14,29.4 15.4,29.4 16.8,29.4 18.2,29.4 19.6,29.4 21,29.4 22.4,29.4 23.8,29.4 25.2,29.4 26.6,29.4 28,29.4 29.4,29.4 30.8,29.4 32.2,29.4 33.6,29.4 35,29.4 36.4,29.4 37.8,29.4 39.2,29.4 40.6,29.4 42,29.4 43.4,29.4 44.8,29.4 46.2,29.4 47.6,29.4 49,29.4 50.4,29.4 51.8,29.4 53.2,29.4 54.6,29.4 58.8,29.4 60.2,29.4 61.6,29.4 67.2,29.4 68.6,29.4 85.4,29.4 98,29.4 2.1,30.8 3.5,30.8 4.9,30.8 10.5,30.8 11.9,30.8 13.3,30.8 97.3,30.8 98.7,30.8 1.4,32.2 2.8,32.2 4.2,32.2 12.6,32.2 15.4,32.2 16.8,32.2 18.2,32.2 19.6,32.2 21,32.2 22.4,32.2 23.8,32.2 25.2,32.2 33.6,32.2 35,32.2 36.4,32.2 37.8,32.2 39.2,32.2 40.6,32.2 42,32.2 43.4,32.2 44.8,32.2 54.6,32.2 56,32.2 57.4,32.2 61.6,32.2 98,32.2 8.479,32.386 29.25,32.419 2.1,33.6 3.5,33.6 4.9,33.6 14.7,33.6 16.1,33.6 17.5,33.6 18.9,33.6 20.3,33.6 21.7,33.6 23.1,33.6 24.5,33.6 25.9,33.6 32.9,33.6 34.3,33.6 35.7,33.6 37.1,33.6 38.5,33.6 39.9,33.6 41.3,33.6 42.7,33.6 44.1,33.6 45.5,33.6 46.9,33.6 97.3,33.6 98.7,33.6 54.6,35 56,35 57.4,35 58.8,35 60.2,35 5.6,37.8 7,37.8 8.4,37.8 9.8,37.8 11.2,37.8 91,37.8 92.4,37.8 93.8,37.8 6.3,39.2 7.7,39.2 9.1,39.2 10.5,39.2 11.9,39.2 13.3,39.2 14.7,39.2 16.1,39.2 17.5,39.2 18.9,39.2 20.3,39.2 21.7,39.2 23.1,39.2 24.5,39.2 25.9,39.2 27.3,39.2 28.7,39.2 30.1,39.2 31.5,39.2 32.9,39.2 34.3,39.2 35.7,39.2 37.1,39.2 38.5,39.2 39.9,39.2 41.3,39.2 42.7,39.2 44.1,39.2 45.5,39.2 46.9,39.2 48.3,39.2 49.7,39.2 51.1,39.2 52.5,39.2 53.9,39.2 55.3,39.2 56.7,39.2 58.1,39.2 59.5,39.2 60.9,39.2 62.3,39.2 63.7,39.2 65.1,39.2 66.5,39.2 84.7,39.2 88.9,39.2 90.3,39.2 91.7,39.2 93.1,39.2 94.5,39.2
  other v2: 82.6,20.8 84.8,20.8 83.7,21.9 82.6,22.9 84.8,22.9 84.1,33.3
LED1: DD1.11 R5.1 | length 6.7
  Top Layer w0.25: DD1.11 85.212,25.633 85.212,26.472 v1(85.7,26.96)
  Bottom Layer w0.25: v1(85.7,26.96) 89.312,26.96 v1(89.712,27.36)
NetC22_2: C22.2 U2.6 | length 4.7
  Top Layer w0.3: C22.2 73.47,27.53 73.97,27.03 75.381,27.03 U2.6@75.865,27.514 ; U2.6@75.853,27.526 75.977,27.65 U2.6
NetC24_1: C24.1 D17.C L1.2 U2.8 | length 9.5
  Top Layer w0.5: U2.8@78.512,27.86 78.562,27.81 C24.1
  Top Layer w1: D17.C@72.812,25.66 72.917,25.555 77.167,25.555 L1.2 77.657,25.6 78.5,26.443 78.5,28.317 U2.8
NetC24_2: C24.2 U2.1 | length 4.4
  Top Layer w0.5: U2.1 78.517,32.063 78.532,32.048 78.532,30.99 C24.2
NetD1_2: D1.2 D2.4 | length 29.5
  Bottom Layer w0.5: D2.4 71.114,35.6 72.336,34.378 75.378,34.378 78.4,37.4 83.3,37.4 87.2,33.5 92.85,33.5 D1.2
NetD2_2: D2.2 D3.4 | length 27
  Bottom Layer w0.5: D3.4 48.3,35.6 49.8,34.1 71.5,34.1 D2.2
NetD3_2: D3.2 D4.4 | length 27
  Bottom Layer w0.5: D4.4 27.14,35.6 28.34,34.4 47.394,34.4 48.394,33.4 51.45,33.4 D3.2
NetD4_2: D4.2 D5.4 | length 27
  Bottom Layer w0.5: D5.4 6.05,35.517 7.167,34.4 27.2,34.4 28.1,33.5 30.6,33.5 31.542,32.558 D4.2
NetD5_2: D5.2 D6.4 | length 12.8
  Bottom Layer w0.5: D6.4 6.05,27.5 D5.2
NetD6_2: D6.2 D7.4 | length 17.2
  Bottom Layer w0.5: D6.2 14.15,21.6 D7.4
NetD7_2: D7.2 D8.4 | length 17.2
  Bottom Layer w0.5: D7.2 34.9,21.6 D8.4
NetD8_2: D8.2 D9.4 | length 17.2
  Bottom Layer w0.5: D8.2 63.36,18.4 66.56,21.6 D9.4
NetD9_2: D9.2 D10.4 | length 26
  Bottom Layer w0.5: D9.2 85.54,18.4 87.64,16.3 91,16.3 91.9,17.2 91.9,19.6 89.9,21.6 D10.4
NetD10_2: D10.2 D11.4 | length 19.5
  Bottom Layer w0.5: D11.4 90.25,6.4 94.8,6.4 95.7,7.3 95.7,16.9 94.2,18.4 D10.2
NetD11_2: D11.2 D12.4 | length 27
  Bottom Layer w0.5: D12.4 69.548,7.6 71.548,5.6 92.75,5.6 D11.2
NetD12_2: D12.2 D13.4 | length 27
  Bottom Layer w0.5: D13.4 47.8,7.6 48.73,6.67 69.53,6.67 71.789,4.411 73.189,4.411 D12.2
NetD13_2: D13.2 D14.4 | length 27
  Bottom Layer w0.5: D14.4 28.4,6 49.6,6 51.139,4.461 52.389,4.461 D13.2
NetD14_2: D14.2 D15.4 | length 27
  Bottom Layer w0.5: D15.4 8.32,5.33 30.37,5.33 31.3,4.4 D14.2
NetD16_A: D16.A R5.2 | length 1.7
  Top Layer w0.25: D16.A@88.012,28.96 88.112,28.86 R5.2
NetDD1_2: DD1.2 Y1.1 | length 3.1
  Top Layer w0.25: DD1.2@86.687,20.36 87.612,20.36 88.612,19.36 Y1.1
NetDD1_3: DD1.3 Y1.3 | length 3.1
  Top Layer w0.25: DD1.3@86.712,20.86 87.712,20.86 88.612,21.76 Y1.3
NetR13_2: R13.2 U2.4 | length 1.3
  Top Layer w0.2: U2.4@74.662,33.91 U2.4@74.712,33.86
  Top Layer w0.6: R13.2 U2.4@74.662,33.91
NRST: DD1.4 R15.2 | length 2.9
  Top Layer w0.25: DD1.4@86.987,21.36 87.412,21.36 88.094,22.041 88.094,22.058 88.662,22.627 R15.2
PA15: DD1.29
PB3: DD1.30
PB4: DD1.31
PB5: DD1.32
SWDIO: DD1.25 SWD1.3 | length 5.5
  Top Layer w0.25: SWD1.3 80.057,18.455 80.057,20.607 80.31,20.86 DD1.25@80.624,20.86
SWLK: DD1.28 SWD1.2 | length 3.5
  Top Layer w0.25: SWD1.2@79.412,16.66 79.512,16.66 80.509,17.657 80.734,17.657 81.712,18.635 DD1.28
T3CH1/ADC6: DD1.13
T3CH2/ADC7: DD1.14
T3CH3/ADC8: DD1.15
T3CH4/ADC9: DD1.16
VCC: C1.1 C2.1 C3.1 C4.1 C5.1 C6.1 C7.1 C8.1 C9.1 C10.1 C11.1 C12.1 C13.1 C14.1 C15.1 C16.1 C18.2 C20.2 C23.1 CAN-AP1.1 D1.1 D2.1 D3.1 D4.1 D5.1 D6.1 D7.1 D8.1 D9.1 D10.1 D11.1 D12.1 D13.1 D14.1 D15.1 L1.1 pad.8 R3.2 R4.2 R6.2 R10.2 U1.3 U3.1 U3.3 | length 404.4
  Top Layer w0.3: C6.1@8.486,20.776 C6.1
  Top Layer w0.4: R4.2 R3.2 85.792,14.073 v1(85.418,13.699) U3.1@85.19,13.699 ; v1(87.667,31.233) 87.782,31.348 87.782,31.901 87.94,32.06 C16.1 ; 87.952,32.152 U1.3@87.952,33.25
  Top Layer w0.7: CAN-AP1.1 27.375,18.987 29.15,20.762 C7.1 29.2,20.812 v1(29.2,21.5)
  Top Layer w1: C6.1@8.486,20.776 v1(8.486,21.59) 7.21,21.59 7.2,21.6 ; C15.1 8.496,6.766 v1(8.496,7.58) 7.2,8.876 7.2,21.6 ; v1(8.5,35.676) 7.2,34.376 7.2,21.6 ; C14.1 29.25,7.529 v1(29.261,7.54) ; C4.1 29.25,34.768 C4.1@29.262,34.779 ; C13.1 50,7.544 v1(50.046,7.59) ; C8.1 50,21.094 v1(50.047,21.14) ; C3.1 v1(50,35.6) ; C2.1 70.6,30.2 ; C12.1 70.75,7.55 v1(70.824,7.624) ; C9.1 70.75,21.65 v1(70.7,21.7) 70.6,21.8 70.6,30.2 ; R6.2 70.6,30.2 ; C23.1 83.809,11.66 v1(85.458,11.66) ; pad.8 91.3,7.8 v1(91.5,7.6) C11.1 ; C10.1 v1(91.5,21.6)
  Top Layer w2: C20.2@74.812,15.66 78.593,11.879 C23.1@83.528,11.879 ; C20.2 C18.2 74.881,18.629 L1.1@76.912,20.66 ; C23.1@83.809,11.66 88.276,7.193 91.39,7.193
  Bottom Layer w0.4: v1(85.418,13.699) 85.438,13.68 85.438,11.68 v1(85.458,11.66)
  Bottom Layer w1: v1(8.496,7.58) 8.517,7.6 D15.1 12.85,9.5 31.9,9.5 ; v1(29.2,21.5) 29.3,21.6 D7.1 ; v1(29.261,7.54) 29.321,7.6 D14.1 31.7,9.3 31.9,9.5 ; v1@29.262,35.6 D4.1 ; v1(50,35.6) D3.1 ; v1(50.046,7.59) 50.056,7.6 D13.1 52.45,9.45 52.5,9.5 ; v1(50.047,21.14) 50.506,21.6 D8.1 ; v1(70.7,21.7) 70.8,21.6 D9.1 ; v1(70.824,7.624) 70.849,7.6 D12.1 73.2,9.5 ; v1(91.5,7.6) D11.1 92.05,9.5 73.2,9.5 ; v1(91.5,21.6) D10.1 ; v1(91.5,35.4) 91.7,35.6 D1.1 ; 31.9,9.5 52.5,9.5 ; 52.5,9.5 73.2,9.5
  Bottom Layer w1.5: v1(8.486,21.59) 8.496,21.6 D6.1 13.15,23.8 31.5,23.8 ; v1(8.5,35.676) D5.1@11.026,35.676 ; D5.1 D5.1@11.026,35.676 ; D7.1 31.7,23.6 31.5,23.8 ; D4.1 31.7,37 32.1,37.4 ; D8.1 52.45,23.65 52.6,23.8 ; D3.1 52.45,37.35 52.4,37.4 ; D2.1 71.4,37.4 52.4,37.4 ; D9.1@73.44,21.36 74.7,21.36 ; v1(76.612,21.36) 74.7,21.36 ; v1@82.912,29.665 77.047,23.8 74.9,23.8 ; v1@83.06,29.86 84.058,30.858 87.292,30.858 ; v1(87.667,31.233) 88.099,30.8 95.6,30.8 96,30.4 ; D10.1 96,23.65 96,30.4 ; D1.1 96,33.55 96,30.4 ; D5.1@11.026,35.676 12.75,37.4 32.1,37.4 ; 31.5,23.8 52.6,23.8 ; 32.1,37.4 52.4,37.4 ; 52.6,23.8 74.9,23.8 ; 74.7,21.36 74.7,23.6 74.9,23.8
  other v1: 82.912,29.86 29.262,35.479
Vin: C17.1 C19.1 CAN1.1 CAN1.2 CAN2.1 CAN2.2 pad.9 R8.2 U2.2 | length 60.8
  Top Layer w0.8: 46.969,15.6 v1(46.969,20.03) ; v1(66.2,22.4) 66.2,32.9 68.1,34.8 pad.9 ; pad.9@68.1,35 70.88,37.78 77.34,37.78 78.485,36.635 78.485,36.185 77.247,34.947 U2.2 ; C19.1@78.485,36.215 79.815,34.885 C17.1 79.762,33.147 R8.2
  Bottom Layer w0.8: v1(46.969,20.03) 46.971,20.03 47.001,20 63.8,20 v1(66.2,22.4) ; CAN1.1 CAN1.2
pads on no net: DD1.7 DD1.9 DD1.10 DD1.20 DD1.21 DD1.22 R11.1 U2.3 U3.4
copper on no net: | length 157.1
  Top Layer w0.17: 100,2.5 ccw(c97.5,2.5) 100,2.5 ; 100,2.5 ccw(c97.5,2.5) 100,2.5 ; 100,37.5 ccw(c97.5,37.5) 100,37.5 ; 100,37.5 ccw(c97.5,37.5) 100,37.5 ; 5,2.5 ccw(c2.5,2.5) 5,2.5 ; 5,37.5 ccw(c2.5,37.5) 5,37.5
  Bottom Layer w0.17: 5,2.5 ccw(c2.5,2.5) 5,2.5 ; 5,37.5 ccw(c2.5,37.5) 5,37.5 ; 100,2.5 ccw(c97.5,2.5) 100,2.5 ; 100,37.5 ccw(c97.5,37.5) 100,37.5

## Polygon pours and split planes (outlines as drawn)
GND on Top Layer "GND_L01_P000" (solid, pour order 0): 0,0 0,40 100,40 100,0
GND on Bottom Layer "GND_L02_P001" (solid, pour order 1): 0,0 0,40 100,40 100,0

## Other copper
Top Layer:
  region net Vin: 79.815,34.885 79.8,34.9 76.856,34.9 76.855,34.901 76.867,34.914 76.867,37.233 76.4,37.7 76.5,37.8 76.7,37.8 76.7,37.915 76.785,38

## Silkscreen, mask and mechanical layers (free items; w line width, h text height)
Top Overlay:
  circle w0.254: c95.2,12.7 r1.194
  region: 13.477,25.106 ccw(c10.533,25.043) 12.936,26.744 cw(c13.892,24.635) 15.57,26.231 ccw(c15.494,23.863)
  region: 8.615,29.973 8.495,30.617 cw(c8.494,30.622) 8.489,30.621 cw(c9,30.664) 9.513,30.664 cw(c9.507,30.664) 9.513,30.664 cw(c9,30.664) 9.513,30.653 9.513,30.664 ccw(c9,30.664) 9.513,30.664 9.513,30.653 9.509,30.27 ccw(c9.503,30.27) 9.509,30.27 cw(c9.503,30.27) 9.505,30.265 8.622,29.969 cw(c8.62,29.974)
  region: 8.663,23.734 cw(c10.325,27.7) 7.801,24.219 cw(c10.008,26.859) 8.32,29.857 ccw(c10.907,26.931)
  region: 8.551,26.045 cw(c11.475,26.572) 10.904,29.487 ccw(c12.983,30.017) 11.367,28.606 ccw(c11.214,25.945)
  region: 12.398,27.953 cw(c12.983,30.017) 11.632,28.351 11.632,27.395
  region: 13.825,27.131 ccw(c11.04,27.651) 10.14,30.338 cw(c9.923,26.367)
  region: 11.914,23.704 ccw(c10.325,27.7) 12.72,24.128 ccw(c8.404,25.007) 12.506,26.611 cw(c10.307,29.481) 12.013,26.294 cw(c8.627,25.126)
  region: 9.143,23.565 ccw(c10.325,27.7) 9.733,23.441 ccw(c7.699,25.144) 10.252,25.866 cw(c10.307,29.481) 9.634,25.929 cw(c6.931,25.257)
  region: 10.339,23.4 ccw(c10.325,27.7) 10.967,23.448 ccw(c8.296,25.376) 11.516,26.074 cw(c10.307,29.481) 10.91,25.916 cw(c7.821,25.294)
  lines w0.01: 8.492,30.664 8.62,29.974 9.503,30.27 9.507,30.664 ; 8.494,30.622 cw(c9,30.664) 9.505,30.613
  lines w0.127: 7.801,24.219 cw(c10.008,26.859) 8.32,29.857 ccw(c10.907,26.931) 8.663,23.734 cw(c10.325,27.7) 7.801,24.219 ; 8.551,26.045 cw(c11.214,25.945) 11.367,28.606 cw(c12.983,30.017) 10.904,29.487 ccw(c11.475,26.572) 8.551,26.045 ; 9.143,23.565 ccw(c6.931,25.257) 9.634,25.929 ccw(c10.307,29.481) 10.252,25.866 cw(c7.699,25.144) 9.733,23.441 cw(c10.325,27.7) 9.143,23.565 ; 10.14,30.338 cw(c9.923,26.367) 13.825,27.131 ccw(c11.04,27.651) 10.14,30.338 ; 10.339,23.4 ccw(c7.821,25.294) 10.91,25.916 ccw(c10.307,29.481) 11.516,26.074 cw(c8.296,25.376) 10.967,23.448 cw(c10.325,27.7) 10.339,23.4 ; 11.632,27.395 11.632,28.351 ccw(c12.983,30.017) 12.398,27.953 11.632,27.395 ; 11.914,23.704 ccw(c10.325,27.7) 12.72,24.128 ccw(c8.404,25.007) 12.506,26.611 cw(c10.307,29.481) 12.013,26.294 cw(c8.627,25.126) 11.914,23.704 ; 12.936,26.744 cw(c10.533,25.043) 13.477,25.106 cw(c15.494,23.863) 15.57,26.231 ccw(c13.892,24.635) 12.936,26.744
  lines w0.2: 55.2,33.373 61.946,33.373 ; 58.573,30 58.573,36.746 ; 62.9,33.373 69.646,33.373 ; 66.273,30 66.273,36.746 ; 93.74,2.5 6.27,2.5 cw(c6.27,3.77) 5,3.77 ccw(c3.77,3.77) 3.77,5 cw(c3.77,6.27) 2.5,6.27 2.5,33.73 cw(c3.77,33.73) 3.77,35 ccw(c3.77,36.23) 5,36.23 cw(c6.27,36.23) 6.27,37.5 93.73,37.5 cw(c93.73,36.23) 95,36.23 ccw(c96.23,36.23) 96.23,35 cw(c96.23,33.73) 97.5,33.73 97.5,6.23 cw(c96.27,6.23) 96.27,5 ccw(c96.27,3.73) 95,3.73 cw(c93.77,3.73) 93.77,2.5
  lines w0.254: 55.2,30 61.946,30 61.946,36.746 55.2,36.746 55.2,30 ; 62.9,30 69.646,30 69.646,36.746 62.9,36.746 62.9,30
  text "CANH" at 55.6,34.8 h0.7
  text "VIN" at 59.3,34.8 h0.7
  text "DIN>" at 93.9,32.2 h0.7 r90
  text "CANL" at 55.7,31.4 h0.7
  text "GND" at 59.283,31.4 h0.7
  text "WING-SIGNAL-NODE V.1.1 / Unmanned Tech. Lab. IU / github.com/ehsan2754/UAV-CAN-MODULES / E.Shaghaei@innopolis.university" at 16,23 h1
  text "<3v3" at 92.8,14.4 h0.7
  text "<DOUT" at 13.8,10.6 h0.7
  text "<5v" at 92.8,10.4 h0.7
Bottom Overlay:
  region: 62.823,25.799 ccw(c59.9,26.326) 60.47,29.241 cw(c58.392,29.772) 60.007,28.36 cw(c60.161,25.7)
  region: 62.711,23.488 ccw(c61.049,27.454) 63.574,23.973 ccw(c61.367,26.613) 63.054,29.612 cw(c60.468,26.685)
  region: 61.035,23.154 cw(c61.049,27.454) 60.408,23.202 cw(c63.078,25.13) 59.859,25.828 ccw(c61.068,29.236) 60.464,25.671 ccw(c63.554,25.049)
  region: 62.231,23.32 cw(c61.049,27.454) 61.641,23.195 cw(c63.676,24.899) 61.122,25.62 ccw(c61.068,29.236) 61.74,25.683 ccw(c64.444,25.012)
  region: 62.76,29.727 62.879,30.371 ccw(c62.881,30.376) 62.886,30.376 ccw(c62.375,30.418) 61.862,30.418 ccw(c61.867,30.418) 61.862,30.418 ccw(c62.375,30.418) 61.862,30.408 61.862,30.418 cw(c62.375,30.418) 61.862,30.418 61.862,30.408 61.866,30.025 cw(c61.871,30.025) 61.866,30.025 ccw(c61.871,30.025) 61.869,30.019 62.753,29.723 ccw(c62.754,29.728)
  region: 57.549,26.885 cw(c60.334,27.406) 61.234,30.092 ccw(c61.452,26.122)
  region: 58.976,27.708 ccw(c58.392,29.772) 59.742,28.105 59.742,27.149
  region: 57.898,24.86 cw(c60.841,24.797) 58.439,26.499 ccw(c57.482,24.389) 55.804,25.986 cw(c55.881,23.617)
  region: 59.46,23.458 cw(c61.049,27.454) 58.655,23.882 cw(c62.971,24.761) 58.869,26.365 ccw(c61.068,29.236) 59.361,26.048 ccw(c62.748,24.88)
  lines w0.01: 61.867,30.418 61.871,30.025 62.754,29.728 62.882,30.418 ; 61.87,30.368 cw(c62.375,30.418) 62.881,30.376
  lines w0.127: 55.804,25.986 cw(c57.482,24.389) 58.439,26.499 ccw(c60.841,24.797) 57.898,24.86 ccw(c55.881,23.617) 55.804,25.986 ; 57.549,26.885 cw(c60.334,27.406) 61.234,30.092 ccw(c61.452,26.122) 57.549,26.885 ; 58.655,23.882 cw(c62.971,24.761) 58.869,26.365 ccw(c61.068,29.236) 59.361,26.048 ccw(c62.748,24.88) 59.46,23.458 cw(c61.049,27.454) 58.655,23.882 ; 58.976,27.708 ccw(c58.392,29.772) 59.742,28.105 59.742,27.149 58.976,27.708 ; 59.859,25.828 ccw(c63.078,25.13) 60.408,23.202 ccw(c61.049,27.454) 61.035,23.154 cw(c63.554,25.049) 60.464,25.671 cw(c61.068,29.236) 59.859,25.828 ; 60.007,28.36 cw(c60.161,25.7) 62.823,25.799 ccw(c59.9,26.326) 60.47,29.241 cw(c58.392,29.772) 60.007,28.36 ; 61.122,25.62 ccw(c63.676,24.899) 61.641,23.195 ccw(c61.049,27.454) 62.231,23.32 cw(c64.444,25.012) 61.74,25.683 cw(c61.068,29.236) 61.122,25.62 ; 62.711,23.488 ccw(c61.049,27.454) 63.574,23.973 ccw(c61.367,26.613) 63.054,29.612 cw(c60.468,26.685) 62.711,23.488
  lines w0.2: 3.77,35 ccw(c3.77,33.73) 2.5,33.73 2.5,6.27 ccw(c3.77,6.27) 3.77,5 cw(c3.77,3.77) 5,3.77 ccw(c6.27,3.77) 6.27,2.5 93.73,2.5 ; 3.77,35.01 ccw(c3.77,36.24) 5,36.24 ; 5,36.23 cw(c6.27,36.23) 6.27,37.5 93.73,37.5 cw(c93.73,36.23) 95,36.23 ccw(c96.23,36.23) 96.23,35 cw(c96.23,33.73) 97.5,33.73 97.5,6.23 cw(c96.27,6.23) 96.27,5 ccw(c96.27,3.73) 95,3.73 ; 93.767,2.505 ccw(c93.767,3.735) 94.997,3.735
  text "Vin / Vin / H / L / GND / GND" at 84.112,30.96 h0.6 r90
  text "WING-SIGNAL-NODE V.1.1 / Unmanned Tech. Lab. IU / github.com/ehsan2754/UAV-CAN-MODULES / E.Shaghaei@innopolis.university" at 53.5,22.9 h1
  text "GND / SWCLK / SWDIO / 3V3" at 76.7,17.2 h0.6 r270
  text "CAUTION" at 55.329,14.07 h2
  text "HIGH-INTENSITY  / VISIBLE LIGHT /  EXPOSURE" at 57.146,9.34 h2
Mechanical 1:
  the board outline again, w0.2